# Altium PCB receiver.PcbDoc
Units mil, origin at the board's own origin, x right, y up, seen from the top; angles counter-clockwise.
Board outline 2706.92 x 2126.92 mil, 2 copper layers (Top Layer, Bottom Layer), stack 62.992 mil thick; 35 components, 28 nets, 402 pads, 40 vias.
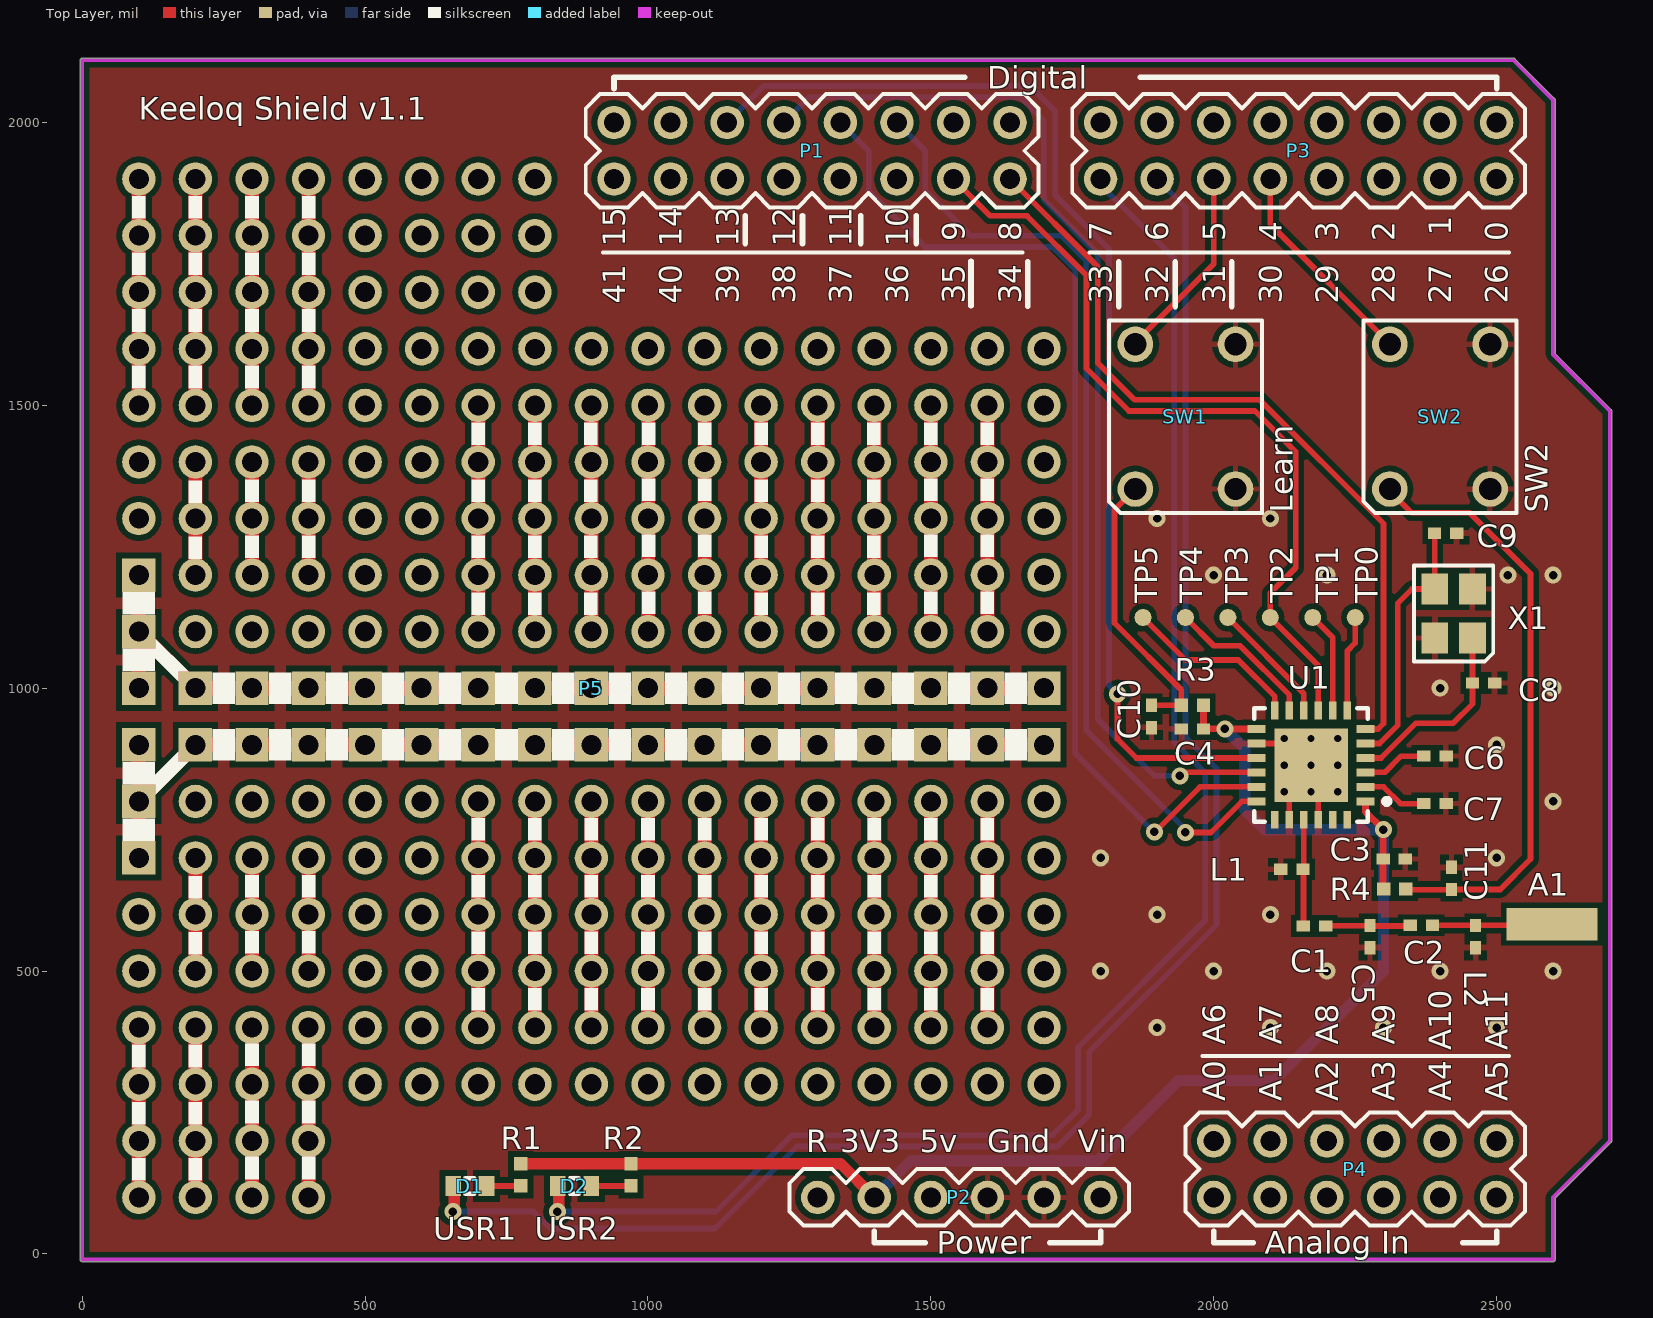
[diagram p0: Top Layer view]
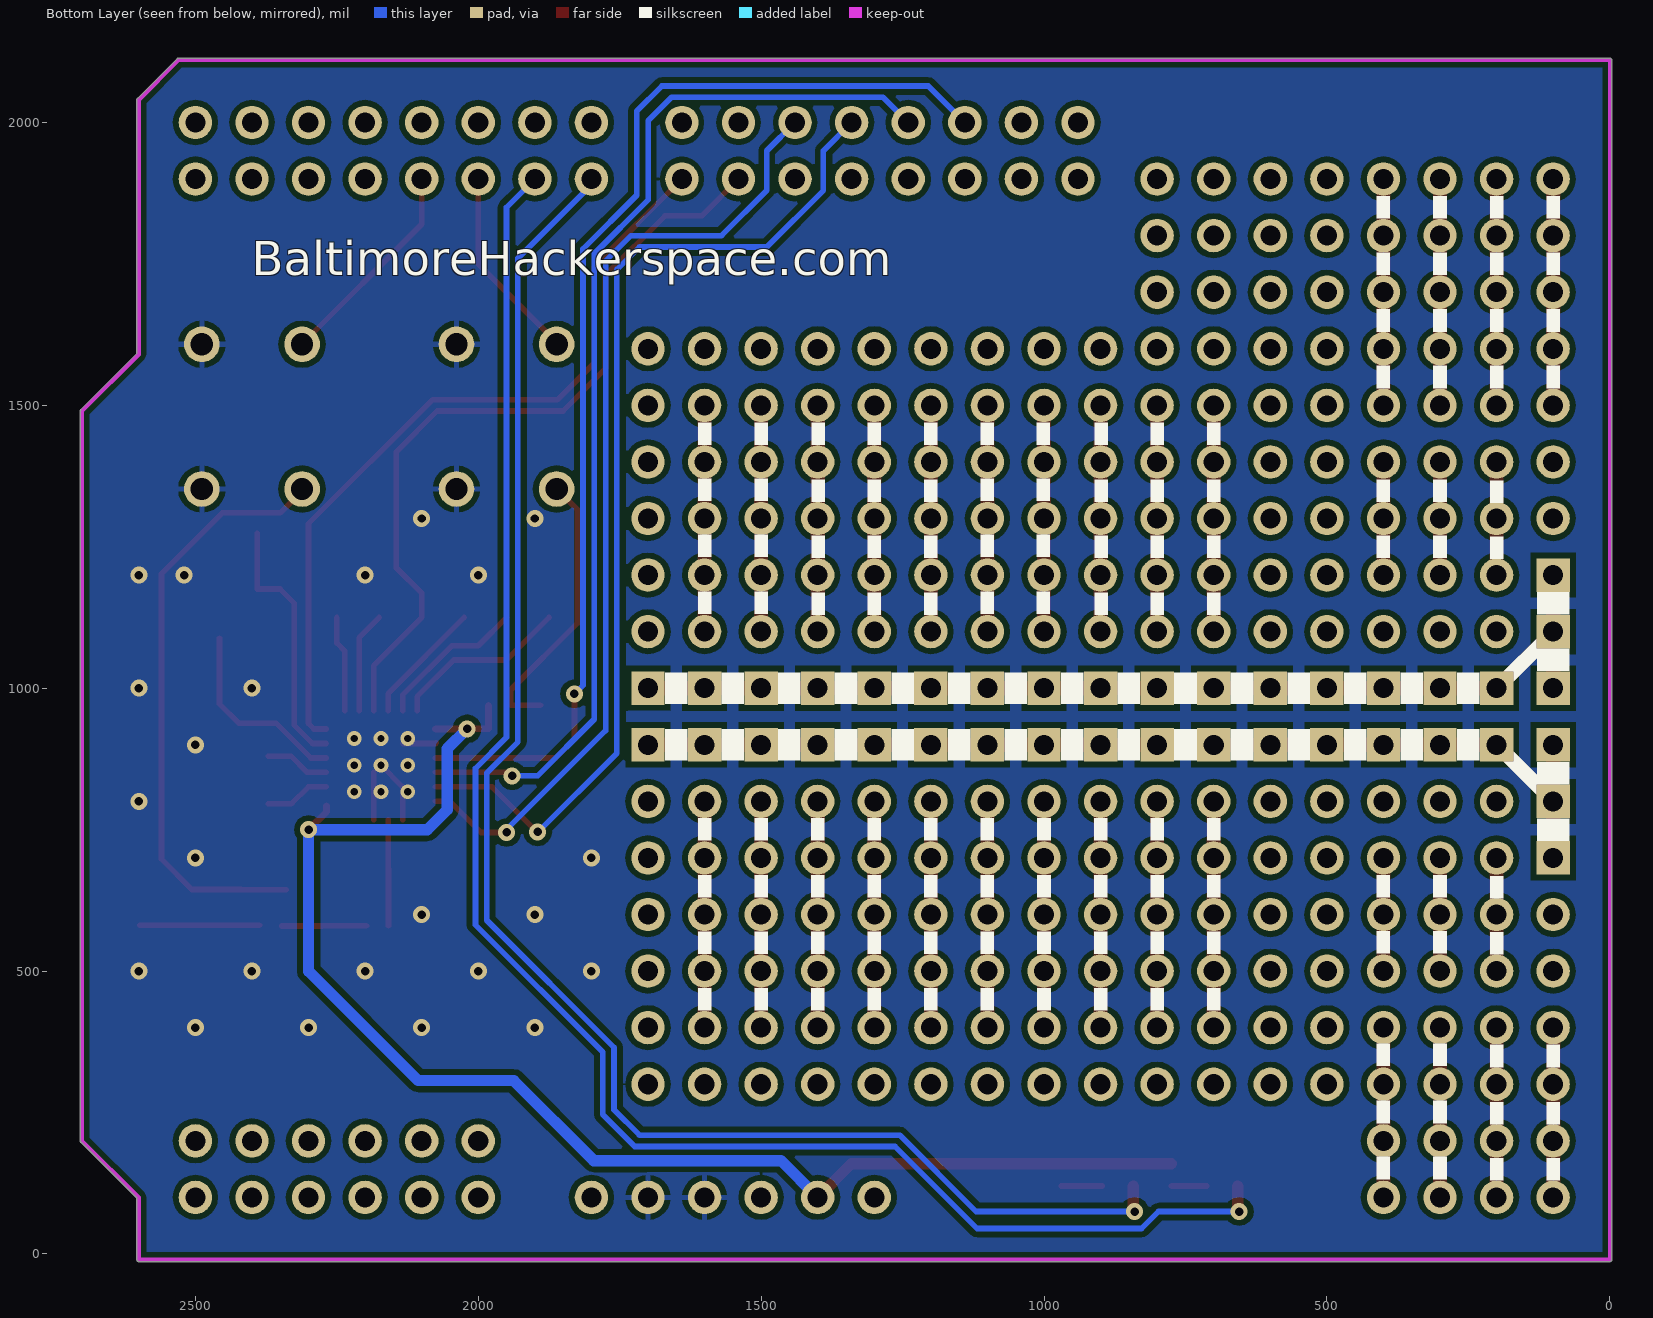
[diagram p1: Bottom Layer view, seen from below]

## Layer stack, top to bottom
Top Layer: signal copper 1.4
Dielectric: core 60.192, FR-4, Dk 4.8
Bottom Layer: signal copper 1.4

## Board outline
0,-13.46 cw(c0,-10) -3.46,-10 -3.46,2110 cw(c0,2110) 0,2113.46 2530,2113.46 cw(c2530,2110) 2532.45,2112.45 2532.44,2112.46 cw(c2530,2110) 2532.46,2112.44 2532.44,2112.46 2602.46,2042.44 ccw(c2600,2040) 2602.44,2042.46 2602.45,2042.45 cw(c2600,2040) 2603.46,2040 2603.46,1591.43 2702.46,1492.44 ccw(c2700,1490) 2702.44,1492.46 2702.45,1492.45 cw(c2700,1490) 2703.46,1490 2703.46,200 cw(c2700,200) 2702.45,197.55 2702.46,197.56 cw(c2700,200) 2702.44,197.54 2702.46,197.56 2603.46,98.57 2603.46,-10 cw(c2600,-10) 2600,-13.46

## Design rules (kind name [scope] priority, off if disabled: settings)
Clearance "Board Edge Clearance" [IsRegion vs (OnLayer('Keep-Out Layer'))] p1: gap=10
Clearance [All] p2: gap=10
ComponentClearance ComponentClearance_1 [All] p1: gap=10 collisioncheckmode=3 verticalgap=1800 showdistances=FALSE
ComponentClearance [InComponent('P5')] p2: gap=0 collisioncheckmode=3 verticalgap=0 showdistances=FALSE
HoleSize [All] p1: absolutevalues=TRUE maxlimit=125 minlimit=1 maxpercent=80.000 minpercent=20.000
MinimumSolderMaskSliver [All] p1: minsoldermaskwidth=1
PolygonConnect PolygonConnect_1 [IsVia] p1: connectstyle=Direct reliefconductorwidth=10 reliefentries=4 polygonreliefangle="90 Angle"
PolygonConnect [All] p2: connectstyle=Relief reliefconductorwidth=10 reliefentries=4 polygonreliefangle="90 Angle"
RoutingVias [All] p1: holewidth=28 width=50 viastyle="Through Hole" minholewidth=28 minwidth=50 maxholewidth=28 maxwidth=50
SilkToSilkClearance [All] p1: silktosilkclearance=1
SilkscreenOverComponentPads [All] p1: minsilkscreentomaskgap=-10
SolderMaskExpansion [All] p1: expansion=4
Width [All] p1: maxlimit=30 minlimit=10 preferedwidth=10
23 further rules are at their usual default settings.

## Components (designator, comment, footprint, x,y, rotation, side; value= is the part's Value field where it differs from the comment)
A1 "Wire Antenna" "WIRE ANTENNA" 2598,583 r270 top
C1 "GRM1555C1H220JZ01D" CAPC1005L 2178,580 r0 top
C2 "GRM1555C1H1R2CZ01D" CAPC1005L 2367,581 r0 top
C3 "GRM155R71C104KA88D" CAPC1005L 2319,698 r180 top
C4 "GRM155R71C104KA88D" CAPC1005L 1962.28,928.19 r0 top
C5 "GRM1555C1H220JZ01D" CAPC1005L 2276,561 r90 top
C6 "GRM155R71C104KA88D" CAPC1005L 2391,880 r180 top
C7 "GRM155R71C104KA88D" CAPC1005L 2391,796 r180 top
C8 "GRM1555C1H150JZ01D" CAPC1005L 2477,1009 r180 top
C9 "GRM1555C1H150JZ01D" CAPC1005L 2410,1274 r180 top
C10 "GRM155R71C104KA88D" CAPC1005L 1890,950 r90 top
C11 "GRM155R71C104KA88D" CAPC1005L 2420,664 r270 top
D1 "Blue LED" "LEDC1608L Blue" 685,120 r180 top
D2 "Red LED" "LEDC1608L RED" 870,120 r180 top
L1 "LQG15HS12NJ02D" CAPC1005L 2138,680 r180 top
L2 "LQW15AN68NJ00D" CAPC1005L 2463,561 r270 top
P1 "Digital Headers" HDR2X8 940,1900 r0 top locked
P2 "Power Header" HDR1X6 1300,100 r0 top locked
P3 "Digital Headers" HDR2X8 1800,1900 r0 top locked
P4 "Analog Header" HDR2X6 2000,100 r0 top locked
P5 "Proto  Area" "PROTO AREA" 100,900 r0 top net-tie
R1 "RC0402JR-07100RL" RESC1005L 775,140 r90 top
R2 "RC0402JR-07470RL" RESC1005L 970,140 r90 top
R3 "RC0402JR-0710KL" RESC1005L 1962.28,969.69 r0 top
R4 "RC0402JR-0710KL" RESC1005L 2320,645 r180 top
SW1 "B3W-1002 BY OMZ" "B3W-1002 BY OMZ" 1950,1480 r270 top
SW2 "B3W-1002 BY OMZ" "B3W-1002 BY OMZ" 2400,1480 r270 top
TP0 "Test Point" "Test Point" 2250,1125 r90 top
TP1 "Test Point" "TEST POINT" 2175,1125 r0 top
TP2 "Test Point" "TEST POINT" 2100,1125 r0 top
TP3 "Test Point" "Test Point" 2025,1125 r90 top
TP4 "Test Point" "Test Point" 1950,1125 r90 top
TP5 "Test Point" "TEST POINT" 1875,1125 r0 top
U1 "SX1239IMLTRT" SX1239IMLTRT 2172,864 r180 top
X1 "7M-32.000MEEQ-T" ABM8G-26.000MHZ-18-D2Y-T 2424,1132 r90 top

## Footprints (in the part's own frame and the unit in brackets; to place one, negate y for a bottom-side part, rotate by r counter-clockwise, add the part's x,y. Pads: shape width x height; smd on the part's side, far side on the other; paste and mask are expansions set on the pad)
ABM8G-26.000MHZ-18-D2Y-T [mm] "ABM8G-26.000MHZ-18-D2Y-T"
  rect 1.4x1.2 smd: 1(-1.1,-0.85) 2(1.1,-0.85) 3(1.1,0.85) 4(-1.1,0.85)
  silkscreen extent -2.16,-1.78 2.16,1.78, body extent -1.6,-1.25 1.6,1.25, height 0.75
"B3W-1002 BY OMZ" [mm]
  round 1.6 hole 1: 1(3.25,-2.25) 2(-3.25,-2.25) 3(3.25,2.25) 4(-3.25,2.25)
  silkscreen extent -4.32,-3.43 4.32,3.43, body extent -3.3,-3 3.3,3, height 4.3
CAPC1005L [mm] "Chip Capacitor, Body 1.0x0.5mm, IPC High Density"
  rect 0.6x0.5 smd: 1(-0.5,0) 2(0.5,0)
  body extent -0.55,-0.3 0.55,0.3, height 1.3
HDR1X6 [mm] "Connector; Header; 6 Position"
  round 1.5 hole 0.9: 1(0,0) 2(2.54,0) 3(5.08,0) 4(7.62,0) 5(10.16,0) 6(12.7,0)
  silkscreen extent -1.27,-1.27 13.97,1.27, body extent -1.27,-1.27 13.97,1.27, height 8.5
HDR2X6 [mm] "Connector; Header; 6x2 Position"
  round 1.5 hole 0.9: 1(0,0) 2(0,2.54) 3(2.54,0) 4(2.54,2.54) 5(5.08,0) 6(5.08,2.54) 7(7.62,0) 8(7.62,2.54) 9(10.16,0) 10(10.16,2.54) 11(12.7,0) 12(12.7,2.54)
  silkscreen extent -1.27,-1.27 13.97,3.81, body extent -1.27,-1.27 13.97,3.81, height 8.85
HDR2X8 [mm] "Connector; Header; 8x2 Position"
  round 1.5 hole 0.9: 1(0,0) 2(0,2.54) 3(2.54,0) 4(2.54,2.54) 5(5.08,0) 6(5.08,2.54) 7(7.62,0) 8(7.62,2.54) 9(10.16,0) 10(10.16,2.54) 11(12.7,0) 12(12.7,2.54) 13(15.24,0) 14(15.24,2.54) 15(17.78,0) 16(17.78,2.54)
  silkscreen extent -1.27,-1.27 19.05,3.81, body extent -1.27,-1.27 19.05,3.81, height 8.51
"LEDC1608L Blue" [mm] "Chip Resistor, Body 1.6x0.8mm, IPC High Density"
  rect 0.7x0.9 smd: 1(-0.75,0) 2(0.75,0)
  silkscreen extent -0.2,-0.35 0.2,0.35, body extent -0.81,-0.4 0.81,0.4, height 0.6
"LEDC1608L RED" [mm] "Chip Resistor, Body 1.6x0.8mm, IPC High Density"
  rect 0.7x0.9 smd: 1(-0.75,0) 2(0.75,0)
  silkscreen extent -0.2,-0.35 0.2,0.35, body extent -0.81,-0.4 0.81,0.4, height 0.6
"PROTO AREA" [mm]
  round 1.5 hole 0.9 unplated: 41(0,10.16) 42(0,12.7) 43(0,15.24) 44(0,17.78) 45(0,20.32) 46(0,-20.32) 46(0,22.86) 47(0,-17.78) 47(0,25.4) 49(0,-7.62) 50(0,-10.16) 51(0,-12.7) 52(0,-15.24) 54(2.54,5.08) 55(2.54,7.62) 56(2.54,12.7) 57(2.54,10.16) 58(2.54,15.24) 59(2.54,17.78) 60(2.54,20.32) 61(2.54,-20.32) 61(2.54,22.86) 62(2.54,-17.78) 62(2.54,25.4) 64(2.54,-2.54) 65(2.54,-5.08) 66(2.54,-7.62) 66(10.16,15.24) 66(12.7,-7.62) 66(20.32,15.24) 66(22.86,-7.62) 66(30.48,15.24) 66(33.02,-7.62) 67(2.54,-10.16) 67(10.16,12.7) 67(10.16,17.78) 67(10.16,20.32) 67(10.16,22.86) 67(10.16,25.4) 67(12.7,-10.16) 67(20.32,12.7) 67(20.32,17.78) 67(22.86,-10.16) 67(30.48,12.7) 67(30.48,17.78) 67(33.02,-10.16) 68(2.54,-12.7) 68(10.16,10.16) 68(12.7,-12.7) 68(20.32,10.16) 68(22.86,-12.7) 68(30.48,10.16) 68(33.02,-12.7) 69(2.54,-15.24) 69(10.16,7.62) 69(12.7,-15.24) 69(20.32,7.62) 69(22.86,-15.24) 69(30.48,7.62) 69(33.02,-15.24) 70(10.16,5.08) 70(20.32,5.08) 70(30.48,5.08) 71(5.08,5.08) 72(5.08,7.62) 73(5.08,10.16) 74(5.08,15.24) 75(5.08,12.7) 76(5.08,17.78) 77(5.08,20.32) 78(5.08,-20.32) 78(5.08,22.86) 79(5.08,-17.78) 79(5.08,25.4) 82(7.62,-17.78) 82(7.62,25.4) 83(7.62,20.32) 84(7.62,-20.32) 84(7.62,22.86) 85(7.62,17.78) 86(7.62,15.24) 87(7.62,12.7) 89(7.62,7.62) 90(7.62,10.16) 91(7.62,5.08) 92(5.08,-2.54) 93(7.62,-2.54) 94(10.16,-2.54) 95(12.7,-2.54) 96(15.24,-2.54) 97(17.78,-2.54) 98(20.32,-2.54) 99(22.86,-2.54) 100(25.4,-2.54) 101(27.94,-2.54) 102(30.48,-2.54) 103(33.02,-2.54) 104(35.56,-2.54) 105(38.1,-2.54) 106(40.64,-2.54) 110(5.08,-5.08) 111(7.62,-5.08) 112(10.16,-5.08) 113(12.7,-5.08) 114(15.24,-5.08) 115(17.78,-5.08) 116(20.32,-5.08) 117(22.86,-5.08) 118(25.4,-5.08) 120(27.94,-5.08) 121(30.48,-5.08) 122(33.02,-5.08) 123(35.56,-5.08) 124(38.1,-5.08) 125(40.64,-5.08) 127(5.08,-7.62) 127(12.7,15.24) 127(15.24,-7.62) 127(22.86,15.24) 127(25.4,-7.62) 127(33.02,15.24) 127(35.56,-7.62) 128(5.08,-10.16) 128(12.7,12.7) 128(12.7,17.78) 128(12.7,20.32) 128(12.7,22.86) 128(12.7,25.4) 128(15.24,-10.16) 128(22.86,12.7) 128(22.86,17.78) 128(25.4,-10.16) 128(33.02,12.7) 128(33.02,17.78) 128(35.56,-10.16) 129(5.08,-12.7) 129(12.7,10.16) 129(15.24,-12.7) 129(22.86,10.16) 129(25.4,-12.7) 129(33.02,10.16) 129(35.56,-12.7) 130(5.08,-15.24) 130(12.7,7.62) 130(15.24,-15.24) 130(22.86,7.62) 130(25.4,-15.24) 130(33.02,7.62) 130(35.56,-15.24) 131(12.7,5.08) 131(22.86,5.08) 131(33.02,5.08) 132(7.62,-7.62) 132(15.24,15.24) 132(17.78,-7.62) 132(25.4,15.24) 132(27.94,-7.62) 132(35.56,15.24) 132(38.1,-7.62) 133(7.62,-12.7) 133(15.24,10.16) 133(17.78,-12.7) 133(25.4,10.16) 133(27.94,-12.7) 133(35.56,10.16) 133(38.1,-12.7) 134(7.62,-10.16) 134(15.24,12.7) 134(15.24,17.78) 134(15.24,20.32) 134(15.24,22.86) 134(15.24,25.4) 134(17.78,-10.16) 134(25.4,12.7) 134(25.4,17.78) 134(27.94,-10.16) 134(35.56,12.7) 134(35.56,17.78) 134(38.1,-10.16) 135(7.62,-15.24) 135(15.24,7.62) 135(17.78,-15.24) 135(25.4,7.62) 135(27.94,-15.24) 135(35.56,7.62) 135(38.1,-15.24) 136(15.24,5.08) 136(25.4,5.08) 136(35.56,5.08) 137(10.16,-7.62) 137(17.78,15.24) 137(20.32,-7.62) 137(27.94,15.24) 137(30.48,-7.62) 137(38.1,15.24) 137(40.64,-7.62) 137(40.64,15.24) 138(10.16,-10.16) 138(17.78,12.7) 138(17.78,17.78) 138(17.78,20.32) 138(17.78,22.86) 138(17.78,25.4) 138(20.32,-10.16) 138(27.94,12.7) 138(27.94,17.78) 138(30.48,-10.16) 138(38.1,12.7) 138(38.1,17.78) 138(40.64,-10.16) 138(40.64,12.7) 138(40.64,17.78) 139(10.16,-15.24) 139(17.78,7.62) 139(20.32,-15.24) 139(27.94,7.62) 139(30.48,-15.24) 139(38.1,7.62) 139(40.64,-15.24) 139(40.64,7.62) 140(10.16,-12.7) 140(17.78,10.16) 140(20.32,-12.7) 140(27.94,10.16) 140(30.48,-12.7) 140(38.1,10.16) 140(40.64,-12.7) 140(40.64,10.16) 141(17.78,5.08) 141(27.94,5.08) 141(38.1,5.08) 141(40.64,5.08)
  rect 1.5x1.5 hole 0.9 unplated: BUS1(0,2.54) BUS1(0,5.08) BUS1(0,7.62) BUS1(2.54,2.54) BUS1(5.08,2.54) BUS1(7.62,2.54) BUS1(10.16,2.54) BUS1(12.7,2.54) BUS1(15.24,2.54) BUS1(17.78,2.54) BUS1(20.32,2.54) BUS1(22.86,2.54) BUS1(25.4,2.54) BUS1(27.94,2.54) BUS1(30.48,2.54) BUS1(33.02,2.54) BUS1(35.56,2.54) BUS1(38.1,2.54) BUS1(40.64,2.54) BUS2(0,-5.08) BUS2(0,-2.54) BUS2(5.08,0) BUS2(7.62,0) BUS2(10.16,0) BUS2(12.7,0) BUS2(15.24,0) BUS2(17.78,0) BUS2(20.32,0) BUS2(22.86,0) BUS2(25.4,0) BUS2(27.94,0) BUS2(30.48,0) BUS2(33.02,0) BUS2(35.56,0) BUS2(38.1,0) BUS2(40.64,0)
  rect 1.5x1.5 hole 0.9: BUS2(0,0) BUS2(2.54,0)
  Top Layer lines w0.635: 0,-20.32 0,-12.7 ; 0,-5.08 0,0 ; 0,-2.54 2.54,0 40.64,0 ; 0,2.54 0,7.62 ; 0,5.08 2.54,2.54 40.64,2.54 ; 0,15.24 0,25.4 ; 2.54,-20.32 2.54,-12.7 ; 2.54,-10.16 2.54,-5.08 ; 2.54,7.62 2.54,12.7 ; 2.54,15.24 2.54,25.4 ; 5.08,-20.32 5.08,-12.7 ; 5.08,-10.16 5.08,-5.08 ; 5.08,7.62 5.08,12.7 ; 5.08,15.24 5.08,25.4 ; 7.62,-20.32 7.62,-12.7 ; 7.62,-10.16 7.62,-5.08 ; 7.62,7.62 7.62,12.7 ; 7.62,15.24 7.62,25.4 ; 15.24,-12.7 15.24,-2.54 ; 15.24,5.08 15.24,15.24 ; 17.78,-12.7 17.78,-2.54 ; 17.78,5.08 17.78,15.24 ; 20.32,-12.7 20.32,-2.54 ; 20.32,5.08 20.32,15.24 ; 22.86,-12.7 22.86,-2.54 ; 22.86,5.08 22.86,15.24 ; 25.4,-12.7 25.4,-2.54 ; 25.4,5.08 25.4,15.24 ; 27.94,-12.7 27.94,-2.54 ; 27.94,5.08 27.94,15.24 ; 30.48,-12.7 30.48,-2.54 ; 30.48,5.08 30.48,15.24 ; 33.02,-12.7 33.02,-2.54 ; 33.02,5.08 33.02,15.24 ; 35.56,-12.7 35.56,-2.54 ; 35.56,5.08 35.56,15.24 ; 38.1,-12.7 38.1,-2.54 ; 38.1,5.08 38.1,15.24
  silkscreen extent -0.74,-19.56 39.88,24.64
RESC1005L [mm] "Chip Resistor, Body 1.1x0.5mm, IPC High Density"
  rect 0.6x0.6 smd: 1(-0.5,0) 2(0.5,0)
  body extent -0.55,-0.3 0.55,0.3, height 2.54
SX1239IMLTRT [mm] "QFN, 24-Leads, Body 5.1x5.1mm (max), Pitch 0.65mm, IPC Medium Density"
  rect 0.8x0.35 smd: 1(-2.45,1.625) 2(-2.45,0.975) 3(-2.45,0.325) 4(-2.45,-0.325) 5(-2.45,-0.975) 6(-2.45,-1.625) 13(2.45,-1.625) 14(2.45,-0.975) 15(2.45,-0.325) 16(2.45,0.325) 17(2.45,0.975) 18(2.45,1.625)
  rect 0.35x0.8 smd: 7(-1.625,-2.45) 8(-0.975,-2.45) 9(-0.325,-2.45) 10(0.325,-2.45) 11(0.975,-2.45) 12(1.625,-2.45) 19(1.625,2.45) 20(0.975,2.45) 21(0.325,2.45) 22(-0.325,2.45) 23(-0.975,2.45) 24(-1.625,2.45)
  rect 3.3x3.3 smd: 25(0,0)
  silkscreen extent -3.53,-2.55 2.55,2.55, body extent -2.55,-2.55 2.55,2.55, height 1
"Test Point" [mil]
  round 30 smd: 1(0,0)
"TEST POINT" [mil]
  round 30 smd: 1(0,0)
"WIRE ANTENNA" [mil]
  rect 57x161 smd: 1(0,0)

## Part data
C1 C5: "CAP 22pF 50V CERAMIC 0402 SMD"
C2: "CAP 1.2pF 50V CERAMIC 0402 SMD"
C3 C4 C6 C7 C10 C11: "CAP 0.1uF 16V CERAMIC 0402 SMD"
C8 C9: "CAP 15pF 50V CERAMIC 0402 SMD"
D1: library part LTST-C193TBKT-5A, "LED Blue 0603 SMD"
D2: library part "LS Q976-NR-1", "LED RED 0603 SMD"
L1: "INDUCTOR 12NH 300MA 0402"
L2: "INDUCTOR 68NH 140MA 0402"
P1 P3: "Header, 8-Pin, Dual row"
P2: "Header, 6-Pin"
P4: "Header, 6-Pin, Dual row"
R1: "100 Ohms 0402"
R2: "470 Ohms 0402"
R3 R4: "10K Ohms 0402"
U1: "Receiver Chip"
X1: "Crystal 36.000 Mhz"

## Via types
v1: diameter 30, hole 15, Top Layer to Bottom Layer, tented both sides, 31 vias
v2: diameter 25.98, hole 12.99, Top Layer to Bottom Layer, tented both sides, 9 vias

## Nets (pads, with @x,y where several pads share a name; then routed paths per layer and width w, separated by ;. In a path a pad name is that pad's centre, name@x,y a point inside that pad or via, vN(x,y) a via of type N, cw(c..) or ccw(c..) an arc to the next point about the centre after c; other vN are vias at no path point)
+3.3V: C3.2 C4.2 P2.2 R1.2 R2.2 R3.2 R4.2 U1.1 U1.13 | length 2677.9
  Top Layer w10: v1@2299.69,749.69 v1(2300,750)
  Top Layer w12: R3.2 C4.2 v1(2019.84,928.19) ; v1@2019.84,927.98 U1.13 ; 2268.46,792 2268.46,781.54 v1(2300,750) ; R4.2@2299.31,645 C3.2 ; C3.2@2299.69,698 v1@2299.69,749.69
  Top Layer w20: R1.2 R2.2 1340.31,159.69 P2.2
  Bottom Layer w20: P2.2 1465,165 1796,165 1937.5,306.5 2106.5,306.5 2300,500 v1(2300,750) 2090,750 2055,785 2055,893.03 v1(2019.84,928.19)
GND: C3.1 C4.1 C5.1 C6.1 C7.1 C8.1 C9.1 C10.1 C11.1 L1.2 L2.2 P2.4 P2.5 SW1.3 SW1.4 SW2.3 SW2.4 U1.14 U1.20 U1.22 U1.25 X1.2 X1.4 | length 255.7
  Top Layer w10: U1.14@2074.43,903.5 U1.14 U1.25@2133.61,902.39 ; U1.20 2133.61,825.61 v2(2172,864) ; U1.22 U1.25@2184.8,851.2
  other v1: 1900,400 2100,400 2300,400 2500,400 1800,500 2000,500 2200,500 2400,500 2600,500 1900,600 2100,600 1800,700 2500,700 2600,800 2500,900 2400,1000 2600,1000 2000,1200 2200,1200 2520,1200 2600,1200 1900,1300 2100,1300
  other v2: 2124.76,816.76 2172,816.76 2219.24,816.76 2124.76,864 2219.24,864 2124.76,911.24 2172,911.24 2219.24,911.24
NetA1_1: A1.1 C2.2 L2.1 | length 211.3
  Top Layer w10: C2.2 A1.1@2598,581
NetC1_1: C1.1 L1.1 U1.21 | length 187.5
  Top Layer w10: C1.1@2158.69,580 L1.1@2158.69,680 ; L1.1@2159.2,680 U1.21
NetC1_2: C1.2 C2.1 C5.2 | length 149.6
  Top Layer w10: C1.2 C5.2@2276,580 ; C5.2@2276,579.69 C2.1@2347.31,579.69
NetC6_2: C6.2 U1.3 | length 114.8
  Top Layer w10: U1.3 2302.2,851.2 2331,880 2362.31,880 C6.2
NetC7_2: C7.2 U1.2 | length 115.1
  Top Layer w10: U1.2 2300.39,825.61 2330,796 C7.2
NetC8_2: C8.2 U1.4 X1.1 | length 344.7
  Top Layer w10: U1.4 2295.8,876.8 2357.31,938.31 2423.31,938.31 2457.31,972.31 C8.2 X1.1@2457.31,1088.54
NetC9_2: C9.2 U1.5 X1.3 | length 460
  Top Layer w10: U1.5 2293.1,902.39 2325,934.28 2325,1150 2350.31,1175.31 X1.3 C9.2@2390.54,1273.78
NetC10_2: C10.2 R3.1 SW1.1 | length 499
  Top Layer w10: SW1.1 1824.71,1315.34 1824.71,1115.29 1942.6,997.4 R3.1 C10.2
NetC11_2: C11.2 R4.1 SW2.1 | length 1058.7
  Top Layer w10: SW2.1@2309.69,1350.31 2350,1310 2452.43,1310 2560,1202.43 2560,698 2506.31,644.31 C11.2 2419.69,644 R4.1@2339.69,644
NetD1_1: D1.1 R1.1 | length 62.1
  Top Layer w10: D1.1@712.56,120 R1.1@774.68,120
NetD1_2: D1.2 P3.3 | length 3053.5
  Top Layer w20: v1@657.44,77.44 D1.2@657.44,120
  Bottom Layer w10: v1(655,75) 797.57,75 827.57,45 1118.28,45 1263.28,190 1723.28,190 1780,246.72 1780,356.72 2005,581.72 2005,858.28 1950,913.28 1950,1850 P3.3
NetD2_1: D2.1 R2.1 | length 72.1
  Top Layer w10: D2.1@897.56,120 R2.1@969.68,120
NetD2_2: D2.2 P3.1 | length 2851.9
  Top Layer w20: v1@842.44,77.44 D2.2@842.44,120
  Bottom Layer w10: v1(840,75) 1120,75 1255,210 1715,210 1760,255 1760,365 1985,590 1985,850 1930,905 1930,1760 1800,1890 P3.1
NetP1_6: P1.6 U1.15 | length 2040
  Top Layer w10: v1(1830,990) 1830,910 1863.2,876.8 U1.15
  Bottom Layer w10: P1.6 1204.53,2064.53 1675.47,2064.53 1719.82,2020.18 1719.82,1871.46 1814.92,1776.36 1814.92,1005.08 v1(1830,990)
NetP1_8: P1.8 U1.16 | length 1904.9
  Top Layer w10: v1@1950,851.2 U1.16
  Bottom Layer w10: P1.8 1284.53,2044.53 1658.44,2044.53 1699.82,2003.15 1699.82,1863.18 1794.92,1768.08 1794.92,945.08 1895,845 v1(1940,845)
NetP1_10: P1.10 U1.17 | length 1833.1
  Top Layer w10: v1(1895,746.25) 1895,745 1975.61,825.61 U1.17
  Bottom Layer w10: P1.10 1390,1950 1390,1880 1490,1780 1715,1780 1754.92,1740.08 1754.92,885.08 1895,745 v1(1895,746.25)
NetP1_12: P1.12 U1.18 | length 1703.3
  Top Layer w10: v1(1950,745) 1995,745 2050.02,800.02 U1.18
  Bottom Layer w10: P1.12 1490,1950 1490,1880 1570,1800 1730,1800 1774.92,1755.08 1774.92,925.08 v1@1950,750
NetP1_13: P1.13 TP2.1 U1.9 | length 1412.4
  Top Layer w10: P1.13 1605,1835 1670,1835 1775,1730 1775,1565 1850,1490 2072.69,1490 2145,1417.69 2145,1213 2100,1168 TP2.1 2184.8,1040.2 U1.9
NetP1_15: P1.15 U1.6 | length 1400.8
  Top Layer w10: P1.15 1795,1745 1795,1575 1860,1510 2080.98,1510 2300,1290.98 2300,937.57 2290.41,927.98 U1.6
NetP3_5: P3.5 SW1.2 | length 348.4
  Top Layer w10: SW1.2@1859.68,1609.69 2000,1750 P3.5
NetP3_7: P3.7 SW2.2 | length 379
  Top Layer w10: P3.7 2100,1820 SW2.2@2311.42,1608.58
NetTP0_1: TP0.1 U1.7 | length 170.4
  Top Layer w10: U1.7 2235.98,1065.98 2250,1080 TP0.1
NetTP1_1: TP1.1 U1.8 | length 179.2
  Top Layer w10: TP1.1 2210.39,1089.61 U1.8
NetTP3_1: TP3.1 U1.10 | length 220.1
  Top Layer w10: TP3.1 2159.2,990.8 U1.10
NetTP4_1: TP4.1 U1.11 | length 268
  Top Layer w10: TP4.1 2000,1075 2046.72,1075 2133.61,988.1 U1.11
NetTP5_1: TP5.1 U1.12 | length 315.8
  Top Layer w10: TP5.1 1950,1050 2043.43,1050 2108.02,985.41 U1.12
pads on no net: P1.1 P1.2 P1.3 P1.4 P1.5 P1.7 P1.9 P1.11 P1.14 P1.16 P2.1 P2.3 P2.6 P3.2 P3.4 P3.6 P3.8 P3.9 P3.10 P3.11 P3.12 P3.13 P3.14 P3.15 P3.16 P4.1 P4.2 P4.3 P4.4 P4.5 P4.6 P4.7 P4.8 P4.9 P4.10 P4.11 P4.12 P5.41 P5.42 P5.43 P5.44 P5.45 P5.46 P5.47 P5.49 P5.50 P5.51 P5.52 P5.54 P5.55 P5.56 P5.57 P5.58 P5.59 P5.60 P5.61 P5.62 P5.64 P5.65 P5.66 P5.67 P5.68 P5.69 P5.70 P5.71 P5.72 P5.73 P5.74 P5.75 P5.76 P5.77 P5.78 P5.79 P5.82 P5.83 P5.84 P5.85 P5.86 P5.87 P5.89 P5.90 P5.91 P5.92 P5.93 P5.94 P5.95 P5.96 P5.97 P5.98 P5.99 P5.100 P5.101 P5.102 P5.103 P5.104 P5.105 P5.106 P5.110 P5.111 P5.112 P5.113 P5.114 P5.115 P5.116 P5.117 P5.118 P5.120 P5.121 P5.122 P5.123 P5.124 P5.125 P5.127 P5.128 P5.129 P5.130 P5.131 P5.132 P5.133 P5.134 P5.135 P5.136 P5.137 P5.138 P5.139 P5.140 P5.141 P5.BUS1 P5.BUS2 U1.19 U1.23 U1.24

## Polygon pours and split planes (outlines as drawn)
GND on Bottom Layer "LYR2-GND" (solid, pour order 3): 0,2100 2540,2100 2600,2040 2600,1590 2700,1490 2700,200 2600,100 2600,0 0,0
GND on Top Layer "LYR1-GND" (solid, pour order 4): 0,2100 2540,2100 2600,2040 2600,1590 2700,1490 2700,200 2600,100 2600,0 0,0

## Keep-outs
Keep-Out Layer:
  lines w6.89: 0,-10 2600,-10 2600,100 2700,200 2700,1490 2600,1590 2600,2040 2530,2110 0,2110 0,-10

## Silkscreen, mask and mechanical layers (free items; w line width, h text height)
Top Overlay:
  lines w6.89: 920,1770 1662,1770 ; 1780,1770 2522,1770 ; 1980,350 2522,350
  lines w10: 940,2060 940,2080 1560,2080 ; 1172,1786 1172,1835 ; 1273,1786 1273,1835 ; 1376,1786 1376,1835 ; 1400,40 1400,20 1490,20 ; 1474,1786 1474,1835 ; 1571,1676 1571,1754.65 ; 1671,1675 1671,1753.65 ; 1710,20 1800,20 1800,40 ; 1832,1674.68 1832,1753.32 ; 1870,2080 2500,2080 2500,2060 ; 1932,1674.68 1932,1753.32 ; 2000,40 2000,20 2070,20 ; 2032,1674.68 2032,1753.32 ; 2440,20 2500,20 2500,40
  text "Digital" at 1600,2060 h40
  text "Keeloq Shield v1.1" at 100,2005 h40
  text "1" at 2420,1800 h40 r90
  text "9" at 1560,1790 h40 r90
  text "8" at 1660,1790 h40 r90
  text "7" at 1820,1790 h40 r90
  text "6" at 1920,1790 h40 r90
  text "5" at 2020,1790 h40 r90
  text "4" at 2120,1790 h40 r90
  text "3" at 2220,1790 h40 r90
  text "2" at 2320,1790 h40 r90
  text "0" at 2520,1790 h40 r90
  text "15" at 960,1780 h40 r90
  text "14" at 1060,1780 h40 r90
  text "13" at 1160,1780 h40 r90
  text "12" at 1260,1780 h40 r90
  text "11" at 1360,1780 h40 r90
  text "10" at 1460,1780 h40 r90
  text "41" at 960,1680 h40 r90
  text "40" at 1060,1680 h40 r90
  text "39" at 1160,1680 h40 r90
  text "38" at 1260,1680 h40 r90
  text "37" at 1360,1680 h40 r90
  text "36" at 1460,1680 h40 r90
  text "35" at 1560,1680 h40 r90
  text "34" at 1660,1680 h40 r90
  text "33" at 1820,1680 h40 r90
  text "32" at 1920,1680 h40 r90
  text "31" at 2020,1680 h40 r90
  text "30" at 2120,1680 h40 r90
  text "29" at 2220,1680 h40 r90
  text "28" at 2320,1680 h40 r90
  text "27" at 2420,1680 h40 r90
  text "26" at 2520,1680 h40 r90
  text "Learn" at 2140,1310 h40 r90
  text "SW2" at 2590,1310 h40 r90
  text "A6" at 2020,370 h40 r90
  text "A7" at 2120,370 h40 r90
  text "A8" at 2220,370 h40 r90
  text "A9" at 2320,370 h40 r90
  text "A10" at 2420,360 h40 r90
  text "A11" at 2520,360 h40 r90
  text "A0" at 2020,270 h40 r90
  text "A1" at 2120,270 h40 r90
  text "A2" at 2220,270 h40 r90
  text "A3" at 2320,270 h40 r90
  text "A4" at 2420,270 h40 r90
  text "A5" at 2520,270 h40 r90
  text "R" at 1280,180 h40
  text "3V3" at 1340,180 h40
  text "5v" at 1480,180 h40
  text "Gnd" at 1600,180 h40
  text "Vin" at 1760,180 h40
  text "USR1" at 620,25 h40
  text "USR2" at 800,25 h40
  text "Power" at 1510,0 h40
  text "Analog In" at 2090,0 h40
Bottom Overlay:
  text "BaltimoreHackerspace.com" at 2400,1730 h60
Mechanical 1:
  lines w6.89: 2600,100 2700,200 2700,1490 2600,1590 2600,2040 2530,2110 0,2110 0,-10 2600,-10 2600,100 ; 2600,100 2620,120 2600,100